# EAGLE board Sensors_Group9 (EAGLE 9.7.0)

Size 398.74 x 181.35 mm. Coordinates in mm from the lower left corner, seen from the top.
Outline: 0,0 398.74,0 398.74,181.35 0,181.35 0,0
Copper layers (1*16): Top 0.035mm / dielectric 1.5mm / Bottom 0.035mm
Design rules "default": minimum track width 6mil, minimum drill 0.35mm, track to track 6mil, track to pad 6mil, pad to pad 6mil, via to via 6mil, smd to smd 6mil, copper to edge 40mil, drill to drill 6mil, minimum pad ring 10mil, minimum via ring 8mil, stop-mask expansion 4mil, vias tented up to drill 0mil, thermal gap 10mil

## Footprints (pad centres in the part's own frame; a part is rotated, then mirrored left to right if it is on the bottom)
LEDRD254W60D565H860B = drill 0.981 pad 1.581: 1 -1.27,0; 2 1.27,0
LEDRD254W60D565H860B_B = drill 0.981 pad 1.581: 1 -1.27,0; 2 1.27,0
LEDRD254W60D565H860B_G = drill 0.981 pad 1.581: 1 -1.27,0; 2 1.27,0
MQ-XX-SOCKET = drill 1.27: 1 -6.223,6.223; 2 -8.788,0; 3 -6.223,-6.223; 4 6.223,-6.223; 5 8.788,0; 6 6.223,6.223
PIEZO = drill 1 pad 1.6: 1 -3.5,0; 2 3.5,0
RESAD1016W63L850D250B = drill 0.83 pad 1.43: 1 -5.08,0; 2 5.08,0
GL5528 = drill 0.8 pad 1.4: 1 -1.702,0; 2 1.702,0
SWITCH-SPDT-PTH-8.5X3.7MM = drill 1.016 pad 1.88: 1 -2.54,0; 2 0,0; 3 2.54,0
ARDUINO-UNO-R3-SHIELD = drill 1.016 pad 1.88: 3.3V 24.13,-2.54; 5V 24.13,0; A0 24.13,12.7; A1 24.13,15.24; A2 24.13,17.78; A3 24.13,20.32; A4 24.13,22.86; A5 24.13,25.4; AREF -24.13,-13.97; D2 -24.13,20.32; D3 -24.13,17.78; D4 -24.13,15.24; D5 -24.13,12.7; D6 -24.13,10.16; D7 -24.13,7.62; D8 -24.13,3.81; D9 -24.13,1.27; D10 -24.13,-1.27; D11 -24.13,-3.81; D12 -24.13,-6.35; D13 -24.13,-8.89; GND@0 24.13,2.54; GND@1 24.13,5.08; GND@2 -24.13,-11.43; IOREF 24.13,-7.62; NC 24.13,-10.16; RES 24.13,-5.08; RX -24.13,25.4; SCL -24.13,-19.05; SDA -24.13,-16.51; TX -24.13,22.86; VIN 24.13,7.62
JHD-162A = drill 1.016 long: 1 -19.05,0; 2 -16.51,0; 3 -13.97,0; 4 -11.43,0; 5 -8.89,0; 6 -6.35,0; 7 -3.81,0; 8 -1.27,0; 9 1.27,0; 10 3.81,0; 11 6.35,0; 12 8.89,0; 13 11.43,0; 14 13.97,0; 15 16.51,0; 16 19.05,0
TO92 = drill 0.813 octagon: 1 -1.27,0; 2 0,1.905; 3 1.27,0

## Placement (x,y rotation side)
D1  RED  [LEDRD254W60D565H860B]  388.84,77.14 180 top
D2  BLUE  [LEDRD254W60D565H860B_B]  363.44,77.14 180 top
D3  GREEN  [LEDRD254W60D565H860B_G]  376.14,77.14 180 top
GAS1  GAS-SENSORMQ-XX-SOCKET  [MQ-XX-SOCKET]  15.16,155.87 270 top
PIEZO1  PIEZO  [PIEZO]  284.87,24.26 180 top
R1  220  [RESAD1016W63L850D250B]  359.63,41.58 270 top
R2  1k  [RESAD1016W63L850D250B]  60.88,172.38 90 top
R3  220  [RESAD1016W63L850D250B]  10.08,136.82 90 top
R4  220  [RESAD1016W63L850D250B]  387.57,89.84 90 top
R5  220  [RESAD1016W63L850D250B]  374.87,89.84 90 top
R6  220  [RESAD1016W63L850D250B]  362.17,89.84 90 top
R7  PHOTOCELL_GL5528  [GL5528]  59.61,162.22 0 top
R8  330  [RESAD1016W63L850D250B]  273.44,24.26 180 top
S1  TOGGLE  [SWITCH-SPDT-PTH-8.5X3.7MM]  372.33,61.9 0 top
S2  TOGGLE  [SWITCH-SPDT-PTH-8.5X3.7MM]  385.03,61.9 0 top
U1  ARDUINO-UNO-R3-SHIELD  [ARDUINO-UNO-R3-SHIELD]  258.67,74.78 270 top
U2  LCD-16X2JHD-162A  [JHD-162A]  343.12,36.63 0 top
U3  ARDUINO-UNO-R3-SHIELD  [ARDUINO-UNO-R3-SHIELD]  47.88,73.62 270 top
U4  TMP36GT9Z_TO92  [TO92]  38.02,162.22 0 top

## Library data of the parts
D1 = Tinkercad; CATEGORY: Opto-Electronic; SUB-CATEGORY: LED; VALUE: LED_RED
D2 = Tinkercad; CATEGORY: Opto-Electronic; SUB-CATEGORY: LED; VALUE: LED_BLUE
D3 = Tinkercad; CATEGORY: Opto-Electronic; SUB-CATEGORY: LED; VALUE: LED_GREEN
GAS1 PIEZO1 R1-R8 S1 S2 U1-U4 = Tinkercad

## Nets
D1_C: D1.2 R4.1
D2_C: D2.2 R6.1
D3_C: D3.2 R5.1
PIEZO1_2: PIEZO1.2 R8.1
U1_5V: R1.1 S1.1 S2.1 U1.5V U2.2
U1_A0: S1.2 U1.A0
U1_A1: S2.2 U1.A1
U1_A2: PIEZO1.1 U1.A2
U1_D2: U1.D2 U2.14
U1_D3: U1.D3 U2.13
U1_D4: U1.D4 U2.12
U1_D5: U1.D5 U2.11
U1_D6: D2.1 U1.D6
U1_D7: D3.1 U1.D7
U1_D8: D1.1 U1.D8
U1_D10: U1.D10 U3.D3
U1_D11: U1.D11 U2.6
U1_D12: U1.D12 U2.4
U2_LED+: R1.2 U2.15
U3_5V: GAS1.1 GAS1.2 GAS1.3 R7.1 U3.5V U4.3
U3_A0: U3.A0 U4.2
U3_A1: R2.1 R7.2 U3.A1
U3_A2: GAS1.4 GAS1.6 R3.2 U3.A2
U3_D5: U1.D9 U3.D5
U3_D7: U1.D13 U3.D7
U3_GND: GAS1.5 R2.2 R3.1 R4.2 R5.2 R6.2 R8.2 S1.3 S2.3 U1.GND@0 U1.GND@1 U1.GND@2 U2.1 U2.3 U2.5 U2.16 U3.GND@0 U3.GND@1 U3.GND@2 U4.1

## Tracks (layer width: path | path; a pad name or v marks a point on that pad's centre or on a via)
D1_C  (1 unrouted)
D2_C  (1 unrouted)
D3_C  (1 unrouted)
PIEZO1_2  (1 unrouted)
U1_5V  (4 unrouted)
U1_A0  (1 unrouted)
U1_A1  (1 unrouted)
U1_A2  (1 unrouted)
U1_D2  (1 unrouted)
U1_D3  (1 unrouted)
U1_D4  (1 unrouted)
U1_D5  (1 unrouted)
U1_D6  (1 unrouted)
U1_D7  (1 unrouted)
U1_D8  (1 unrouted)
U1_D10  (1 unrouted)
U1_D11  (1 unrouted)
U1_D12  (1 unrouted)
U2_LED+  (1 unrouted)
U3_5V  (5 unrouted)
U3_A0  (1 unrouted)
U3_A1  (2 unrouted)
U3_A2  (3 unrouted)
U3_D5  (1 unrouted)
U3_D7  (1 unrouted)
U3_GND  (19 unrouted)